# EAGLE board 008 (EAGLE 9.6.2)
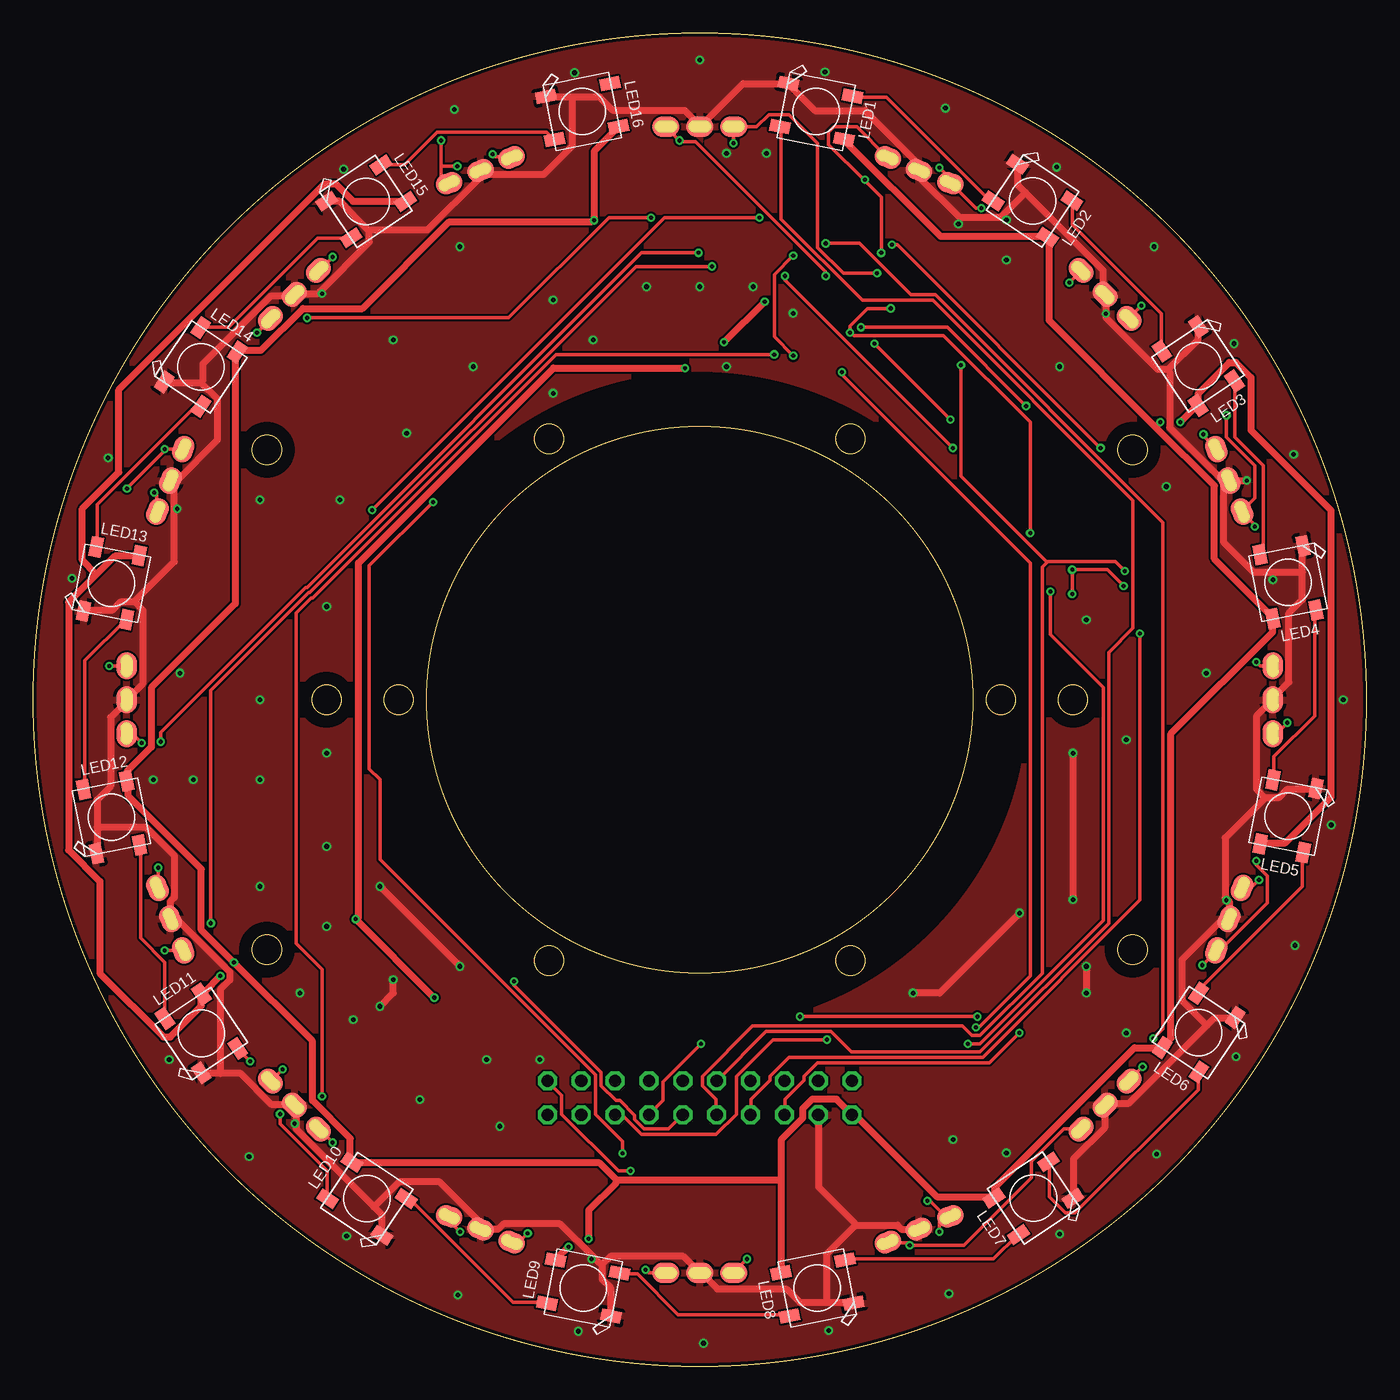
[diagram p0: board, top side]
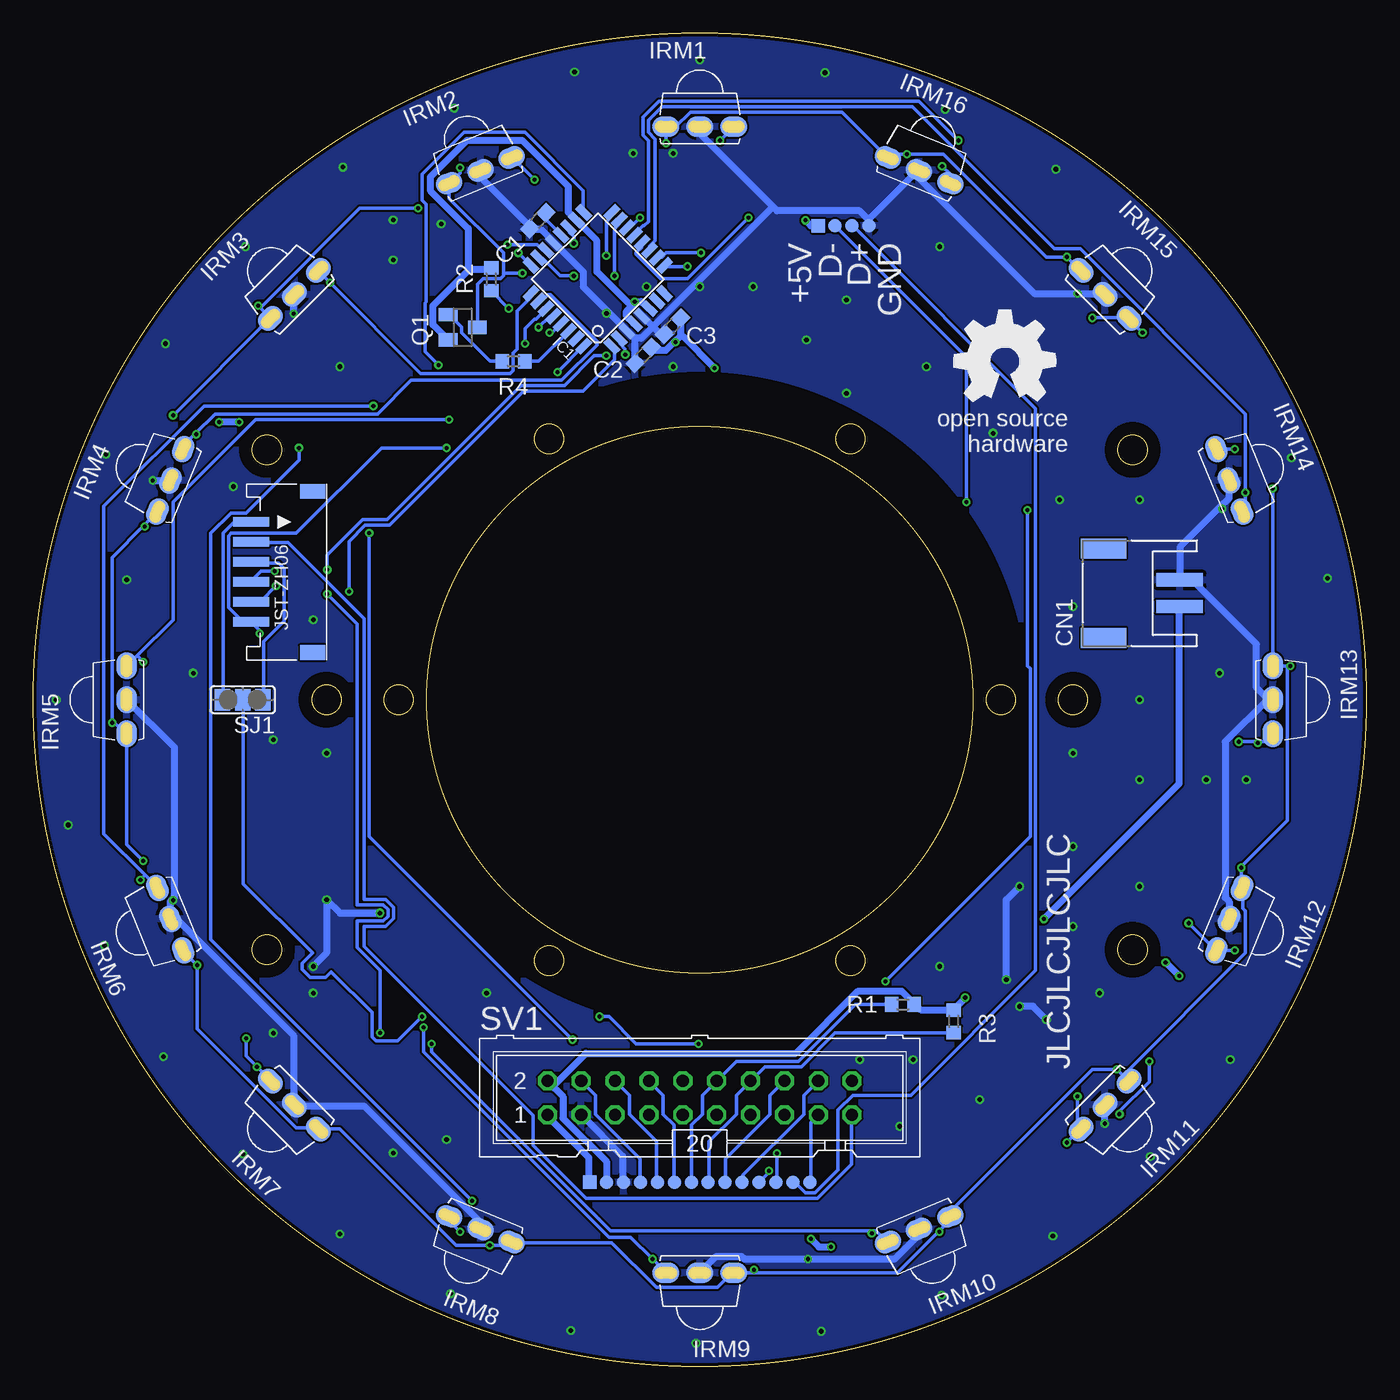
[diagram p1: board, bottom side, seen from below]

Size 100 x 100 mm. Coordinates in mm from the lower left corner, seen from the top.
Outline: circle at 78,50 radius 1.1
Outline: circle at 22,50 radius 1.1
Outline: circle at 17.52,68.75 radius 1.1
Outline: circle at 17.52,31.25 radius 1.1
Outline: circle at 82.48,68.75 radius 1.1
Outline: circle at 82.48,31.25 radius 1.1
Outline: circle at 61.3,69.57 radius 1.1
Outline: circle at 38.7,69.57 radius 1.1
Outline: circle at 72.6,50 radius 1.1
Outline: circle at 38.7,30.43 radius 1.1
Outline: circle at 27.4,50 radius 1.1
Outline: circle at 61.3,30.43 radius 1.1
Outline: circle at 50,50 radius 20.5
Outline: circle at 50,50 radius 50
Copper layers (1*16): Top 0.035mm / dielectric 1.5mm / Bottom 0.035mm
Design rules "SeeedStudio_2layer_DRU_no_angle_20140221": minimum track width 6mil, minimum drill 12mil, track to track 6mil, track to pad 6mil, pad to pad 6mil, via to via 6mil, smd to smd 0mil, copper to edge 10mil, drill to drill 10mil, minimum pad ring 10mil, minimum via ring 6mil, stop-mask expansion 2mil, vias tented up to drill 100mil, thermal gap 10mil
Net classes: 0 default: width 0.254 mm; 1 PWR: width 0.508 mm
tRestrict: area 25.5,25.5 to 74.5,74.5; area 20,48 to 24,52; area 76,48 to 80,52; area 80.5,66.8 to 84.5,70.8; area 15.5,66.7 to 19.5,70.7; area 15.5,29.2 to 19.5,33.2; area 80.5,29.3 to 84.5,33.3
bRestrict: area 25.5,25.5 to 74.5,74.5; area 20,48 to 24,52; area 76,48 to 80,52; area 80.5,66.8 to 84.5,70.8; area 15.5,66.7 to 19.5,70.7; area 15.5,29.2 to 19.5,33.2; area 80.5,29.3 to 84.5,33.3

## Footprints (pad centres in the part's own frame; a part is rotated, then mirrored left to right if it is on the bottom)
C1608 = smd 1.1 x 1: 1 -0.85,0; 2 0.85,0
S2B-PH-SM4-TB = smd 1 x 3.5: 1 1,-1; 2 -1,-1 | smd 1.5 x 3.4: S1 -3.35,4.7; S2 3.35,4.7
TQFP32-08 = smd 1.27 x 0.559: 1 -4.293,2.8; 2 -4.293,2; 3 -4.293,1.2; 4 -4.293,0.4; 5 -4.293,-0.4; 6 -4.293,-1.2; 7 -4.293,-2; 8 -4.293,-2.8; 17 4.293,-2.8; 18 4.293,-2; 19 4.293,-1.2; 20 4.293,-0.4; 21 4.293,0.4; 22 4.293,1.2; 23 4.293,2; 24 4.293,2.8 | smd 0.559 x 1.27: 9 -2.8,-4.293; 10 -2,-4.293; 11 -1.2,-4.293; 12 -0.4,-4.293; 13 0.4,-4.293; 14 1.2,-4.293; 15 2,-4.293; 16 2.8,-4.293; 25 2.8,4.293; 26 2,4.293; 27 1.2,4.293; 28 0.4,4.293; 29 -0.4,4.293; 30 -1.2,4.293; 31 -2,4.293; 32 -2.8,4.293
MYPARTS_IRM_3633N3 = smd 2 x 1.524 bottom: GND-B 0,0; OUT-B 2.54,0; VCC-B -2.54,0 | smd 2 x 1.524: GND-T 0,0; OUT-T 2.54,0; VCC-T -2.54,0
WS2812B = smd 1.5 x 0.9: 1-VDD 2.45,-1.65; 2-DOUT 2.45,1.65; 3-GND -2.45,1.65; 4-DIN -2.45,-1.65
ZH-SM4-SIDE06 = smd 0.7 x 2.7: 1 -10.35,-5.65; 2 -8.85,-5.65; 3 -7.35,-5.65; 4 -5.85,-5.65; 5 -4.35,-5.65; 6 -2.85,-5.65 | smd 1.1 x 1.9: P$1 -0.55,-1.05; P$2 -12.65,-1.05
SOT23 = smd 1 x 1.4: 1 -0.95,-1.1; 2 0.95,-1.1; 3 0,1.1
R0603 = smd 1 x 1.1: 1 -0.85,0; 2 0.85,0
SJ_2 = smd 1.168 x 1.6: 1 -1.524,0; 2 0,0; 3 1.524,0
ML20 = drill 0.914 octagon: 1 -11.43,-1.27; 2 -11.43,1.27; 3 -8.89,-1.27; 4 -8.89,1.27; 5 -6.35,-1.27; 6 -6.35,1.27; 7 -3.81,-1.27; 8 -3.81,1.27; 9 -1.27,-1.27; 10 -1.27,1.27; 11 1.27,-1.27; 12 1.27,1.27; 13 3.81,-1.27; 14 3.81,1.27; 15 6.35,-1.27; 16 6.35,1.27; 17 8.89,-1.27; 18 8.89,1.27; 19 11.43,-1.27; 20 11.43,1.27
TP10SQ = smd 1 x 1: TP 0,0
TP10R = smd 1 x 1: TP 0,0

## Placement (x,y rotation side)
C1  0.1μ  [C1608]  62.15,85.94 225 bottom
C2  0.1μ  [C1608]  54.24,75.84 225 bottom
C3  0.1μ  [C1608]  52.04,78.04 225 bottom
CN1  [S2B-PH-SM4-TB]  15,58 90 bottom
IC1  MEGA8-AI  [TQFP32-08]  57.65,81.54 135 bottom
IRM1  IRM-3638N3  [MYPARTS_IRM_3633N3]  50,93 0 bottom
IRM2  IRM-3638N3  [MYPARTS_IRM_3633N3]  66.46,89.73 22.5 bottom
IRM3  IRM-3638N3  [MYPARTS_IRM_3633N3]  80.41,80.41 45 bottom
IRM4  IRM-3638N3  [MYPARTS_IRM_3633N3]  89.73,66.46 67.5 bottom
IRM5  IRM-3638N3  [MYPARTS_IRM_3633N3]  93,50 90 bottom
IRM6  IRM-3638N3  [MYPARTS_IRM_3633N3]  89.73,33.54 112.5 bottom
IRM7  IRM-3638N3  [MYPARTS_IRM_3633N3]  80.41,19.59 135 bottom
IRM8  IRM-3638N3  [MYPARTS_IRM_3633N3]  66.46,10.27 157.5 bottom
IRM9  IRM-3638N3  [MYPARTS_IRM_3633N3]  50,7 180 bottom
IRM10  IRM-3638N3  [MYPARTS_IRM_3633N3]  33.54,10.27 202.5 bottom
IRM11  IRM-3638N3  [MYPARTS_IRM_3633N3]  19.59,19.59 225 bottom
IRM12  IRM-3638N3  [MYPARTS_IRM_3633N3]  10.27,33.54 247.5 bottom
IRM13  IRM-3638N3  [MYPARTS_IRM_3633N3]  7,50 270 bottom
IRM14  IRM-3638N3  [MYPARTS_IRM_3633N3]  10.27,66.46 292.5 bottom
IRM15  IRM-3638N3  [MYPARTS_IRM_3633N3]  19.59,80.41 315 bottom
IRM16  IRM-3638N3  [MYPARTS_IRM_3633N3]  33.54,89.73 337.5 bottom
LED1  WS2812B5050  [WS2812B]  58.74,94.14 348.8 top
LED2  WS2812B5050  [WS2812B]  74.97,87.44 326.3 top
LED3  WS2812B5050  [WS2812B]  87.39,75.03 303.8 top
LED4  WS2812B5050  [WS2812B]  94.13,58.82 281.3 top
LED5  WS2812B5050  [WS2812B]  94.14,41.26 258.8 top
LED6  WS2812B5050  [WS2812B]  87.44,25.03 236.3 top
LED7  WS2812B5050  [WS2812B]  75.03,12.61 213.8 top
LED8  WS2812B5050  [WS2812B]  58.82,5.87 191.3 top
LED9  WS2812B5050  [WS2812B]  41.26,5.86 168.8 top
LED10  WS2812B5050  [WS2812B]  25.03,12.56 146.3 top
LED11  WS2812B5050  [WS2812B]  12.61,24.97 123.8 top
LED12  WS2812B5050  [WS2812B]  5.87,41.18 101.3 top
LED13  WS2812B5050  [WS2812B]  5.86,58.74 78.8 top
LED14  WS2812B5050  [WS2812B]  12.56,74.97 56.3 top
LED15  WS2812B5050  [WS2812B]  24.97,87.39 33.8 top
LED16  WS2812B5050  [WS2812B]  41.18,94.13 11.3 top
P1  S6B-ZR-SM4A-TF  [ZH-SM4-SIDE06]  78,53 270 bottom
Q1  BSS84  [SOT23]  67.78,77.94 270 bottom
R1  33k  [R0603]  34.76,27.14 180 bottom
R2  33k  [R0603]  65.65,81.54 270 bottom
R3  33k  [R0603]  30.95,25.87 270 bottom
R4  47  [R0603]  63.97,75.4 180 bottom
SJ1  [SJ_2]  84.29,50 180 bottom
SV1  [ML20]  50,20.14 0 bottom
TP1  TPSQTP10SQ  [TP10SQ]  58.26,13.8 90 bottom
TP2  TPSQTP10R  [TP10R]  56.98,13.8 90 bottom
TP3  TPSQTP10R  [TP10R]  55.72,13.8 90 bottom
TP4  TPSQTP10R  [TP10R]  54.45,13.8 90 bottom
TP5  TPSQTP10R  [TP10R]  53.17,13.8 90 bottom
TP6  TPSQTP10R  [TP10R]  51.91,13.8 90 bottom
TP7  TPSQTP10R  [TP10R]  45.55,13.8 90 bottom
TP8  TPSQTP10R  [TP10R]  48.09,13.8 90 bottom
TP9  TPSQTP10R  [TP10R]  46.83,13.8 90 bottom
TP10  TPSQTP10R  [TP10R]  50.63,13.8 90 bottom
TP11  TPSQTP10R  [TP10R]  49.37,13.8 90 bottom
TP12  TPSQTP10SQ  [TP10SQ]  41.11,85.56 180 bottom
TP13  TPSQTP10R  [TP10R]  39.84,85.56 180 bottom
TP14  TPSQTP10R  [TP10R]  38.57,85.56 180 bottom
TP15  TPSQTP10R  [TP10R]  37.3,85.56 180 bottom
TP16  TPSQTP10R  [TP10R]  43.02,13.8 270 bottom
TP17  TPSQTP10R  [TP10R]  44.28,13.8 270 bottom
TP18  TPSQTP10R  [TP10R]  41.74,13.8 0 bottom
U$1  [OSHW_8MM]  27.14,75.4 0 bottom

## Library data of the parts
C1-C3 = rcl; SPICEPREFIX: C
CN1 = jst-ph
IC1 = atmel; MPN: ATMEGA8-16AU; OC_FARNELL: 9171371; OC_NEWARK: 73M8863
IRM1-IRM16 = #002-CPU
LED1-LED16 = microbuilder
P1 = zh
Q1 = transistor-small-signal
R1-R4 = rcl; SPICEPREFIX: R
SJ1 = jumper
SV1 = con-ml; OC_FARNELL: unknown; OC_NEWARK: unknown
TP1-TP18 = testpad
U$1 = oshw

## Nets
!BALL_RST: IC1.30 R4.1
!RESET: IC1.29 R2.2 SV1.15
+3V3 [PWR]: C2.1 C3.1 CN1.2 IC1.4 IC1.6 IC1.18 Q1.2 R1.1 R2.1 R3.1 SV1.2 TP2.TP
+5V [PWR]: LED1.1-VDD LED2.1-VDD LED3.1-VDD LED4.1-VDD LED5.1-VDD LED6.1-VDD LED7.1-VDD LED8.1-VDD LED9.1-VDD LED10.1-VDD LED11.1-VDD LED12.1-VDD LED13.1-VDD LED14.1-VDD LED15.1-VDD LED16.1-VDD SV1.1 TP1.TP TP12.TP
BALL01: IC1.23 IRM1.OUT-B IRM1.OUT-T
BALL02: IC1.24 IRM2.OUT-B IRM2.OUT-T
BALL03: IC1.25 IRM3.OUT-B IRM3.OUT-T
BALL04: IC1.26 IRM4.OUT-B IRM4.OUT-T
BALL05: IC1.27 IRM5.OUT-B IRM5.OUT-T
BALL06: IC1.28 IRM6.OUT-B IRM6.OUT-T
BALL07: IC1.19 IRM7.OUT-B IRM7.OUT-T
BALL08: IC1.22 IRM8.OUT-B IRM8.OUT-T
BALL09: IC1.32 IRM9.OUT-B IRM9.OUT-T
BALL10: IC1.1 IRM10.OUT-B IRM10.OUT-T
BALL11: IC1.2 IRM11.OUT-B IRM11.OUT-T
BALL12: IC1.9 IRM12.OUT-B IRM12.OUT-T
BALL13: IC1.10 IRM13.OUT-B IRM13.OUT-T
BALL14: IC1.11 IRM14.OUT-B IRM14.OUT-T
BALL15: IC1.12 IRM15.OUT-B IRM15.OUT-T
BALL16: IC1.13 IRM16.OUT-B IRM16.OUT-T
BALL_VIN: IRM1.VCC-B IRM1.VCC-T IRM2.VCC-B IRM2.VCC-T IRM3.VCC-B IRM3.VCC-T IRM4.VCC-B IRM4.VCC-T IRM5.VCC-B IRM5.VCC-T IRM6.VCC-B IRM6.VCC-T IRM7.VCC-B IRM7.VCC-T IRM8.VCC-B IRM8.VCC-T IRM9.VCC-B IRM9.VCC-T IRM10.VCC-B IRM10.VCC-T IRM11.VCC-B IRM11.VCC-T IRM12.VCC-B IRM12.VCC-T IRM13.VCC-B IRM13.VCC-T IRM14.VCC-B IRM14.VCC-T IRM15.VCC-B IRM15.VCC-T IRM16.VCC-B IRM16.VCC-T Q1.3
CAM-UTIL: SJ1.2 SV1.13
D+: TP14.TP TP16.TP
D-: TP13.TP TP17.TP
GND [PWR]: C1.2 C2.2 C3.2 CN1.1 IC1.3 IC1.5 IC1.21 IRM1.GND-B IRM1.GND-T IRM2.GND-B IRM2.GND-T IRM3.GND-B IRM3.GND-T IRM4.GND-B IRM4.GND-T IRM5.GND-B IRM5.GND-T IRM6.GND-B IRM6.GND-T IRM7.GND-B IRM7.GND-T IRM8.GND-B IRM8.GND-T IRM9.GND-B IRM9.GND-T IRM10.GND-B IRM10.GND-T IRM11.GND-B IRM11.GND-T IRM12.GND-B IRM12.GND-T IRM13.GND-B IRM13.GND-T IRM14.GND-B IRM14.GND-T IRM15.GND-B IRM15.GND-T IRM16.GND-B IRM16.GND-T LED1.3-GND LED2.3-GND LED3.3-GND LED4.3-GND LED5.3-GND LED6.3-GND LED7.3-GND LED8.3-GND LED9.3-GND LED10.3-GND LED11.3-GND LED12.3-GND LED13.3-GND LED14.3-GND LED15.3-GND LED16.3-GND SV1.3 TP3.TP TP15.TP
MISO: IC1.16 P1.5 SV1.5
MOSI: IC1.15 P1.6 SV1.7
N$1: LED12.2-DOUT LED13.4-DIN
N$2: LED6.2-DOUT LED7.4-DIN
N$3: C1.1 IC1.20
N$4: Q1.1 R4.2
NEOPIXEL: LED1.4-DIN SV1.10
NEOPIXEL1: LED1.2-DOUT LED2.4-DIN
NEOPIXEL2: LED2.2-DOUT LED3.4-DIN
NEOPIXEL3: LED3.2-DOUT LED4.4-DIN
NEOPIXEL4: LED4.2-DOUT LED5.4-DIN
NEOPIXEL5: LED5.2-DOUT LED6.4-DIN
NEOPIXEL6: LED7.2-DOUT LED8.4-DIN
NEOPIXEL7: LED8.2-DOUT LED9.4-DIN
NEOPIXEL8: LED9.2-DOUT LED10.4-DIN
NEOPIXEL9: LED10.2-DOUT LED11.4-DIN
NEOPIXEL10: LED11.2-DOUT LED12.4-DIN
NEOPIXEL11: LED13.2-DOUT LED14.4-DIN
NEOPIXEL12: LED14.2-DOUT LED15.4-DIN
NEOPIXEL13: LED15.2-DOUT LED16.4-DIN
NRST: SV1.8 TP6.TP
RX-CAM: P1.1 SJ1.3
RX-PC: SV1.16 TP8.TP
SCK: IC1.17 P1.4 SV1.9
SCL: R3.2 SV1.14 TP11.TP
SDA: R1.2 SV1.12 TP10.TP
SS1: IC1.14 SV1.11
SS-CAM: P1.3 SJ1.1
SWCLK: SV1.4 TP4.TP
SWDIO: SV1.6 TP5.TP
SWO: SV1.17 TP18.TP
TX-CAM: P1.2 SV1.19
TX-PC: SV1.18 TP9.TP
UI: SV1.20 TP7.TP

## Tracks (layer width: path | path; a pad name or v marks a point on that pad's centre or on a via)
!BALL_RST
  Bottom 0.254: R4.1 62.09,75.4 59.86,77.64 IC1.30
!RESET  (via drill 0.3)
  Top 0.254: v64.33,79.36 62.6,79.36 61.28,78.04 v61.28,77.53 61.38,77.53 61.58,77.33 68.29,77.33 74.79,70.83 v74.79,62.5 | v59.55,24.5 55.49,24.5 52.74,21.75 52.74,18.91 51.22,17.39 45.63,17.39 44.21,18.81 43.7,18.81 SV1.15
  Bottom 0.254: v64.33,79.36 R2.2 | v61.28,77.53 61.07,77.53 60.47,78.14 IC1.29 | v59.55,24.5 74.79,39.74 v74.79,62.5
+3V3  (via drill 0.3)
  Top 0.508: v54.88,79.87 v51.83,76.82 | v30.09,27.65 v24.19,33.54 24.4,33.64 24.4,60.26 39.03,74.89 v48.88,74.89
  Bottom 0.508: 67.27,82.31 65.75,82.31 R2.1 | 67.27,82.31 70.02,79.57 70.02,78.14 68.9,77.03 Q1.2 | 51.42,77.33 51.42,78.55 C3.1 | 51.88,76.87 52.54,76.21 53.35,76.21 53.56,76.42 C2.1 | 51.88,76.87 51.42,77.33 | 54.77,79.87 54.37,79.87 53.86,79.36 IC1.6 | 55.13,79.52 55.49,79.16 55.49,78.75 54.98,78.25 IC1.4 | 55.13,79.52 54.77,79.87 | 55.13,79.52 57.72,82.11 57.72,84.44 59.25,85.97 IC1.18 59.45,86.17 59.86,86.58 59.86,88.51 63.31,91.96 67.47,91.96 70.22,89.22 70.22,88.2 67.37,85.36 67.37,82.51 67.27,82.31 | v51.83,76.82 51.88,76.87 | v54.88,79.87 54.77,79.87 | TP2.TP 57.01,13.83 57.01,15.35 60.26,18.61 60.26,20.23 61.38,21.35 SV1.2 60.87,21.15 58.53,23.48 42.79,23.48 38.11,28.16 34.86,28.16 34.05,27.34 R1.1 33.85,27.14 33.44,26.73 31,26.73 R3.1 30.8,26.94 v30.09,27.65 | v24.19,33.54 14.03,43.7 14.03,56.91 CN1.2 | v48.88,74.89 51.22,77.23 51.42,77.33
+5V  (via drill 0.3)
  Top 0.508: 4.74,59.4 6.11,60.77 7.94,60.77 LED13.1-VDD | 4.74,59.4 2.65,57.31 2.65,38.72 4.99,36.39 4.99,29.48 9.77,24.7 10.27,24.7 12.61,27.04 12.61,27.85 LED11.1-VDD 12.81,28.05 v14.03,29.27 | 4.74,59.4 3.67,60.47 3.67,64.33 6.41,67.07 6.41,73.27 21.86,88.71 22.67,88.71 23.99,87.39 27.85,87.39 LED15.1-VDD | LED16.1-VDD 43.9,92.98 42.08,91.15 v42.08,85.97 41.87,85.87 31.2,85.87 24.7,79.36 20.23,79.36 17.08,76.21 15.46,76.21 LED14.1-VDD 15.25,76.01 15.15,75.91 15.15,57.21 8.85,50.91 8.85,46.44 7.02,44.62 7.02,44.01 LED12.1-VDD 7.12,43.7 7.12,42.79 12.61,37.3 12.61,32.73 v15.05,30.29 20.94,24.4 20.94,19.93 23.79,17.08 23.79,15.46 LED10.1-VDD 23.99,15.25 42.48,15.25 43.8,13.93 | LED5.1-VDD 92.06,39.23 93.89,39.23 97.35,42.69 97.35,64.22 91.35,70.22 91.35,74.18 90.23,75.3 89.73,75.3 87.39,72.96 87.39,72.15 LED3.1-VDD 87.19,71.95 v86.07,70.83 | LED1.1-VDD 60.87,91.96 68.09,84.75 76.01,84.75 LED2.1-VDD 76.21,84.54 76.21,78.45 84.19,70.47 | 56.1,13.93 56.1,16.98 57.72,18.61 57.72,19.32 58.43,20.03 60.26,20.03 61.38,18.91 SV1.1 61.68,18.81 67.78,12.71 72.05,12.71 LED7.1-VDD 72.15,12.92 72.15,13.42 82.61,23.89 84.65,23.89 LED6.1-VDD 84.85,24.09 85.36,24.6 85.36,47.46 92.98,55.08 92.98,55.99 LED4.1-VDD 92.88,56.3 88.61,60.57 88.61,66.05 84.19,70.47 | 56.1,13.93 56.1,7.02 LED8.1-VDD | 56.1,13.93 43.8,13.93 | v40.14,8.95 39.23,8.04 LED9.1-VDD | v41.67,9.56 41.67,11.7 43.7,13.73 43.8,13.93 | 84.19,70.47 v84.54,70.83
  Bottom 0.508: TP12.TP 41.67,85.56 v42.08,85.97 | TP1.TP 58.33,13.83 58.33,15.66 61.48,18.81 SV1.1 | v40.14,8.95 41.06,8.95 v41.67,9.56 | v84.54,70.83 v86.07,70.83 | v15.05,30.29 v14.03,29.27
BALL01  (via drill 0.3)
  Top 0.254: v59.45,81.8 59.45,82.11 49.7,91.86 48.58,91.86 v48.48,91.96 47.46,92.98 IRM1.OUT-T
  Bottom 0.254: v59.45,81.8 60.47,81.8 61.79,83.12 62.09,83.12 IC1.23 | v48.48,91.96 47.46,92.98 IRM1.OUT-T
BALL02  (via drill 0.3)
  Top 0.254: v63.61,83.53 63.61,87.69 62.34,88.96 | 62.34,88.96 59.65,91.66 59.65,92.57 60.06,92.98 61.79,92.98 64.02,90.74 IRM2.OUT-T | v62.39,89.01 62.34,88.96
  Bottom 0.254: v63.61,83.53 62.7,82.61 IC1.24 | v62.39,89.01 64.02,90.64 IRM2.OUT-T
BALL03  (via drill 0.3)
  Top 0.254: v77.74,81.29 78.55,82.11 IRM3.OUT-T
  Bottom 0.254: IC1.25 62.7,80.48 62.7,80.17 63.72,79.16 63.72,76.31 64.02,76.01 64.02,74.69 64.22,74.49 70.93,74.49 v77.74,81.29 78.55,82.11 IRM3.OUT-T
BALL04  (via drill 0.3)
  Top 0.254: v87.8,69.91 87.8,69.81 88.71,68.9 IRM4.OUT-T
  Bottom 0.254: 87.85,69.96 88.71,69.1 88.71,68.9 IRM4.OUT-T | 87.85,69.96 86.37,71.44 74.18,71.44 71.64,73.98 60.36,73.98 57.72,76.62 57.72,76.92 61.18,80.38 61.38,80.38 61.79,79.97 62.09,79.97 IC1.26 | v87.8,69.91 87.85,69.96
BALL05  (via drill 0.3)
  Top 0.254: v68.8,71.03 v63.11,76.72 | IRM5.OUT-T 92.06,52.54 v91.76,52.84
  Bottom 0.254: v63.11,76.72 63.11,77.84 62.39,78.55 62.29,78.55 61.58,79.26 IC1.27 | v68.8,71.03 83.33,71.03 89.52,64.83 89.52,55.99 92.22,53.3 | 92.22,53.3 92.98,52.54 IRM5.OUT-T | 92.22,53.3 v91.76,52.84
BALL06  (via drill 0.3)
  Top 0.254: v62.09,77.94 68.59,77.94 v74.49,72.05 | v91.96,36.49 91.45,35.98 90.74,35.98 IRM6.OUT-T
  Bottom 0.254: v62.09,77.94 61.28,78.75 60.97,78.75 IC1.28 | v74.49,72.05 87.19,72.05 94.7,64.53 94.7,39.94 91.6,36.84 | 91.6,36.84 90.74,35.98 IRM6.OUT-T | 91.6,36.84 v91.96,36.49
BALL07  (via drill 0.3)
  Top 0.254: v59.45,84.24 61.99,84.24 65.85,80.38 67.68,80.38 84.75,63.31 84.75,25.31 v84.04,24.6 | v83.22,22.47 82.21,21.45 IRM7.OUT-T
  Bottom 0.254: v59.45,84.24 59.45,84.75 59.75,85.05 59.75,85.36 IC1.19 | v84.04,24.6 84.04,23.28 v83.22,22.47 82.21,21.45 IRM7.OUT-T
BALL08  (via drill 0.3)
  Top 0.254: v64.43,84.14 64.83,84.14 v80.07,68.9 | v67.07,12.41 67.27,12.41 68.39,11.29 68.8,11.29 IRM8.OUT-T 68.39,11.19 67.98,10.78 v67.98,10.07
  Bottom 0.254: v64.43,84.14 62.19,84.14 61.79,83.73 61.58,83.73 IC1.22 | v80.07,68.9 80.07,67.98 84.04,64.02 85.15,64.02 86.68,62.5 86.68,32.02 v67.07,12.41 | v67.98,10.07 68.8,10.88 68.8,11.19 IRM8.OUT-T
BALL09  (via drill 0.3)
  Top 0.254: v60.67,74.59 60.67,74.38 74.79,60.26 74.79,29.27 70.93,25.41 v70.73,25.41 | v53.56,8.04 52.54,7.02 IRM9.OUT-T
  Bottom 0.254: v60.67,74.59 58.74,76.52 IC1.32 | v70.73,25.41 70.73,23.58 56.81,9.66 55.18,9.66 v53.56,8.04 52.54,7.02 IRM9.OUT-T
BALL10  (via drill 0.3)
  Top 0.254: v76.31,58.13 76.31,54.88 80.28,50.91 80.28,33.44 71.03,24.19 v70.12,24.19 | v37.1,9.97 36.49,9.36 35.98,9.36 IRM10.OUT-T
  Bottom 0.254: v76.31,58.13 76.31,61.89 75.09,63.11 73.27,63.11 63.21,73.16 58.74,73.16 56.4,75.5 56.4,76.11 56.5,76.21 56.5,76.52 IC1.1 | v70.12,24.19 70.12,23.58 56.71,10.17 37.1,10.17 | 37.1,10.17 36.79,10.17 35.98,9.36 IRM10.OUT-T | v37.1,9.97 37.1,10.17
BALL11  (via drill 0.3)
  Top 0.254: v55.59,75.91 39.23,75.91 20.94,57.62 20.84,57.62 19.72,56.5 19.72,31.71 21.65,29.78 v21.65,20.23 | v22.47,16.78 21.45,17.79 IRM11.OUT-T
  Bottom 0.254: v55.59,75.91 55.59,76.31 55.99,76.72 55.99,77.03 IC1.2 | v21.65,20.23 21.65,18.1 21.45,17.89 IRM11.OUT-T 21.45,17.79 v22.47,16.78
BALL12  (via drill 0.3)
  Top 0.254: v50.91,82.51 45.23,82.51 20.74,58.03 20.64,58.03 13.32,50.71 v13.32,33.24 | v9.87,31.2 11.19,31.2 IRM12.OUT-T
  Bottom 0.254: v50.91,82.51 52.54,82.51 IC1.9 | v13.32,33.24 11.29,31.2 IRM12.OUT-T 11.19,31.2 v9.87,31.2
BALL13  (via drill 0.3)
  Top 0.254: v49.9,83.53 45.63,83.53 20.54,58.43 20.43,58.43 9.56,47.56 v9.56,46.85 | IRM13.OUT-T 7.43,47.46 v8.14,46.75
  Bottom 0.254: v49.9,83.53 52.54,83.53 52.84,83.22 53.15,83.22 IC1.10 | 8.14,46.85 7.63,46.85 7.02,47.46 IRM13.OUT-T | 8.14,46.85 v9.56,46.85 | v8.14,46.75 8.14,46.85
BALL14  (via drill 0.3)
  Top 0.254: v9.05,65.55 9.26,65.34 9.26,64.12 IRM14.OUT-T
  Bottom 0.254: IC1.11 53.76,83.73 53.76,84.04 53.35,84.44 53.35,92.06 53.86,92.57 53.86,93.48 52.84,94.5 34.05,94.5 23.38,83.83 21.45,83.83 9.05,71.44 v9.05,65.55 9.05,64.33 9.26,64.12 IRM14.OUT-T
BALL15  (via drill 0.3)
  Top 0.254: v46.34,86.17 43.19,86.17 35.67,78.65 v20.54,78.65 | v16.78,77.53 17.79,78.55 IRM15.OUT-T
  Bottom 0.254: v46.34,86.17 50.91,81.6 52.95,81.6 54.77,83.43 54.77,83.53 54.37,83.93 54.37,84.24 IC1.12 | v20.54,78.65 17.89,78.65 IRM15.OUT-T 17.79,78.55 v16.78,77.53
BALL16  (via drill 0.3)
  Top 0.254: 30.59,90.03 30.59,89.32 31.1,88.81 IRM16.OUT-T | 30.59,90.03 v30.59,91.96 | 30.59,90.03 v31.81,90.03
  Bottom 0.254: v30.59,91.96 33.54,94.91 53.05,94.91 54.27,93.69 54.27,92.37 53.86,91.96 53.86,85.87 54.17,85.56 54.27,85.56 54.88,84.95 IC1.13 | v31.81,90.03 31.2,89.42 31.2,88.81 IRM16.OUT-T
BALL_VIN  (via drill 0.3)
  Top 0.254: v52.54,91.76 IRM1.VCC-T 52.64,92.98 54.27,92.98 55.18,93.89 56.71,93.89 58.84,91.76 58.84,83.93 60.77,82 v63.31,82 | v22.47,83.22 21.45,82.21 IRM15.VCC-T | v34.45,90.94 34.66,90.74 35.88,90.74 IRM16.VCC-T | IRM14.VCC-T 11.19,68.8 v9.87,68.8 9.87,68.69 v7.02,65.85 | v5.7,52.54 IRM13.VCC-T | v9.36,37.4 9.36,35.98 IRM12.VCC-T | v83.12,79.57 82.21,78.65 IRM3.VCC-T | v67.98,89.93 68.8,89.12 68.8,88.81 IRM2.VCC-T 68.9,88.71 70.73,86.88 v71.13,86.88 | 65.8,9.11 65.85,9.05 69.81,9.05 74.89,14.13 74.89,15.35 77.33,17.79 78.55,17.79 IRM7.VCC-T | 65.8,9.11 65.65,9.26 64.12,9.26 IRM8.VCC-T | IRM5.VCC-T 93.28,47.46 v94.09,48.27 | v91.66,63.01 91.66,63.11 90.74,64.02 IRM4.VCC-T 90.74,64.22 91.66,65.14 91.66,67.58 89.52,69.71 v89.52,71.34 | v87.69,30.09 88.71,31.1 IRM6.VCC-T 88.81,31.31 89.12,31.31 92.57,34.76 92.57,36.79 91.76,37.61 v91.76,37.91 | v18.71,22.26 17.89,21.45 IRM11.VCC-T | v45.94,7.23 46.14,7.02 47.46,7.02 IRM9.VCC-T | v32.02,10.07 31.2,10.88 31.2,11.19 IRM10.VCC-T | v65.75,9.05 65.8,9.11
  Bottom 0.254: v52.54,91.76 IRM1.VCC-T 52.44,92.98 51.83,92.98 50.71,94.09 39.33,94.09 35.98,90.74 IRM16.VCC-T 35.88,90.74 35.67,90.94 v34.45,90.94 31.71,90.94 23.99,83.22 v22.47,83.22 21.45,82.21 IRM15.VCC-T | v9.87,68.8 11.19,68.8 IRM14.VCC-T | v7.02,65.85 7.02,52.64 IRM13.VCC-T v5.7,52.54 5.91,52.44 5.91,40.96 9.36,37.5 v9.36,37.4 9.36,35.98 IRM12.VCC-T 9.26,35.78 9.26,34.35 9.05,34.15 9.05,31 18.2,21.86 IRM11.VCC-T 17.89,21.45 v18.71,22.26 20.54,22.26 31.1,11.7 31.1,11.29 IRM10.VCC-T 31.2,11.19 31.2,10.99 32.07,10.12 | 64.73,82 64.73,83.53 68.8,87.59 68.8,88.71 IRM2.VCC-T 68.69,88.81 67.98,89.52 v67.98,89.93 | 64.73,82 64.73,81.8 64.94,81.6 66.26,81.6 66.66,81.19 66.66,77.94 Q1.3 | v71.13,86.88 75.5,86.88 82.92,79.46 v83.12,79.57 82.21,78.65 IRM3.VCC-T 82.31,78.55 v89.52,71.34 | 91.71,63.06 90.74,64.02 IRM4.VCC-T | 91.71,63.06 94.09,60.67 v94.09,48.27 93.89,48.27 93.08,47.46 IRM5.VCC-T 92.98,47.36 92.98,39.13 v91.76,37.91 | v91.66,63.01 91.71,63.06 | IRM6.VCC-T 88.71,31.1 v87.69,30.09 87.69,25.31 80.28,17.89 78.65,17.89 IRM7.VCC-T 78.55,17.79 77.03,17.79 68.29,9.05 v65.75,9.05 64.43,9.05 64.22,9.26 IRM8.VCC-T 64.02,9.26 56.6,9.26 53.25,5.91 48.68,5.91 47.56,7.02 IRM9.VCC-T 47.46,7.02 45.94,7.02 | 45.94,7.02 35.17,7.02 32.07,10.12 | v45.94,7.23 45.94,7.02 | v32.02,10.07 32.07,10.12 | 64.73,82 v63.31,82
CAM-UTIL  (via drill 0.3)
  Top 0.254: v57.52,26.23 v70.83,26.23 | v50.1,24.19 47.26,21.35 47.26,19.93 46.24,18.91 SV1.13
  Bottom 0.254: v70.83,26.23 72.66,24.4 74.28,24.4 74.59,24.7 74.59,26.53 77.65,29.59 78.08,29.17 79.22,29.17 79.83,29.78 79.83,30.22 79.06,31 84.24,36.18 84.24,50 SJ1.2 | v57.52,26.23 56.81,26.23 54.77,24.19 v50.1,24.19
D+
  Bottom 0.254: TP16.TP 42.99,13.73 42.79,13.73 42.08,13.02 41.36,13.02 39.64,14.74 39.64,19.21 38.52,20.33 34.15,20.33 24.8,29.68 24.8,71.84 38.52,85.56 TP14.TP
D-  (via drill 0.3)
  Top 0.254: v44.21,15.96 44.21,16.88 42.18,18.91 42.18,21.86 26.02,38.01 26.02,44.01 25.21,44.82 25.21,60.06 v29.98,64.83
  Bottom 0.254: v44.21,15.96 44.21,13.83 TP17.TP | v29.98,64.83 29.98,75.7 TP13.TP
GND  (via drill 0.3, 0.35)
  Top 0.508: v91.05,66.46 89.83,66.46 IRM4.GND-B | 85.15,74.79 87.39,77.03 87.39,77.94 LED3.3-GND | 85.15,74.79 84.34,74.79 80.48,78.65 v80.48,78.96 80.48,80.38 IRM3.GND-B 80.28,80.58 80.28,82.21 74.44,88.05 | 74.44,88.05 73.88,88.61 73.88,90.13 LED2.3-GND | 74.44,88.05 72.56,86.17 69.51,86.17 66.46,89.22 IRM2.GND-B 66.36,89.93 66.36,90.23 62.39,94.2 58.64,94.2 56.81,96.03 LED1.3-GND 56.6,96.23 53.25,96.23 50.2,93.18 IRM1.GND-B 50,93.08 48.88,94.2 43.5,94.2 42.48,95.21 40.45,95.21 | IRM4.GND-B 89.52,66.56 89.12,66.56 85.25,70.42 85.25,74.59 85.15,74.79 | LED7.3-GND 78.04,12.61 78.04,15.56 80.38,17.89 80.38,19.52 IRM7.GND-B 80.58,19.72 82.21,19.72 88.05,25.57 | 88.05,25.57 88.61,26.12 90.13,26.12 LED6.3-GND | 92.37,42.69 93.48,42.69 94.09,43.29 96.23,43.29 LED5.3-GND | 92.37,42.69 91.76,43.29 91.76,48.78 92.98,50 IRM5.GND-B 93.08,50.2 94.2,51.32 94.2,56.5 95.21,57.52 95.21,59.55 | 95.21,59.55 95.21,61.48 LED4.3-GND | 89.73,34.86 89.73,33.64 IRM6.GND-B 89.52,33.44 89.12,33.44 86.17,30.49 86.17,27.45 88.05,25.57 | 89.73,34.86 89.42,35.17 89.42,39.64 92.27,42.48 92.37,42.69 | v89.52,34.96 89.73,34.86 | 95.21,59.55 91.55,59.55 89.32,61.79 89.32,66.36 IRM4.GND-B | 14.03,21.96 15.56,21.96 17.89,19.62 19.52,19.62 IRM11.GND-B 19.72,19.42 19.72,18.2 | 14.03,21.96 12.61,21.96 LED11.3-GND | 25.57,11.95 19.72,17.79 19.72,18.2 | 25.57,11.95 26.12,11.39 26.12,9.87 LED10.3-GND | v19.62,18.2 19.72,18.2 | 42.69,7.63 42.69,6.52 43.29,5.91 43.29,3.77 LED9.3-GND | 42.69,7.63 43.29,8.24 48.78,8.24 50,7.02 IRM9.GND-B 50.2,6.92 51.32,5.8 56.5,5.8 57.52,4.79 59.55,4.79 | 59.55,4.79 61.48,4.79 LED8.3-GND
  Top 0.508: 42.02,8.19 42.48,7.73 42.69,7.63 | 42.02,8.19 39.53,10.68 35.27,10.68 34.86,10.27 33.64,10.27 IRM10.GND-B 33.44,10.48 33.44,10.88 30.49,13.83 27.45,13.83 25.57,11.95 | 61.68,10.58 64.83,10.58 65.14,10.27 66.36,10.27 IRM8.GND-B | 61.68,10.58 59.55,8.45 59.55,4.79 | SV1.3 58.94,18.81 58.94,13.42 61.58,10.78 61.68,10.58 | v41.87,8.04 42.02,8.19 | 12.61,73.77 9.87,73.77 LED14.3-GND | 12.61,73.77 13.83,72.56 13.83,69.51 10.78,66.46 IRM14.GND-B 10.58,66.26 10.58,64.33 | 7.63,57.31 6.52,57.31 5.91,56.71 3.77,56.71 LED13.3-GND | 7.63,57.31 8.24,56.71 8.24,51.22 7.02,50 IRM13.GND-B 6.92,49.8 5.8,48.68 5.8,43.5 4.79,42.48 4.79,40.45 | 4.79,40.45 4.79,38.52 LED12.3-GND | 4.79,40.45 8.45,40.45 10.58,38.32 10.58,35.17 10.27,34.86 10.27,33.64 IRM12.GND-B 10.48,33.44 10.88,33.44 14.74,29.58 14.74,28.97 14.03,28.26 14.03,21.96 | 10.58,64.33 10.58,60.36 7.73,57.52 7.63,57.31 | v10.78,64.33 10.58,64.33 | 40.45,95.21 38.52,95.21 LED16.3-GND | 25.21,85.15 22.97,87.39 22.06,87.39 LED15.3-GND | 25.21,85.15 25.21,84.34 21.5,80.63 | 21.5,80.63 21.35,80.48 19.62,80.48 IRM15.GND-B 19.42,80.28 17.79,80.28 12.71,75.2 12.71,73.98 12.61,73.77 | 25.21,85.15 25.41,85.25 29.58,85.25 33.54,89.22 IRM16.GND-B 33.74,89.42 38.32,89.42 40.45,91.55 40.45,95.21 | v21.65,80.48 21.5,80.63 | v78,46 v78,35 | v79,30 v79,28 | v74,34 68,28 v66,28 | v26,27 27,28 v27,29 | v26,36 v32,30
  Bottom 0.508: v91.05,66.46 89.83,66.46 IRM4.GND-B | v80.48,78.96 80.48,80.38 IRM3.GND-B | IRM8.GND-B 66.46,10.78 75.2,19.52 80.38,19.52 IRM7.GND-B 80.48,19.82 80.48,24.8 89.12,33.44 89.52,33.44 IRM6.GND-B 89.73,33.64 89.73,34.86 | 89.73,34.86 89.42,35.17 89.42,46.44 92.98,50 IRM5.GND-B | v89.52,34.96 89.73,34.86 | v19.62,18.2 19.62,19.52 IRM11.GND-B | IRM10.GND-B 33.64,10.17 33.64,9.77 35.37,8.04 v41.87,8.04 46.65,8.04 46.85,8.24 48.78,8.24 50,7.02 IRM9.GND-B 50,7.5 | TP3.TP 55.79,13.83 55.79,15.76 58.84,18.81 SV1.3 | 54.88,77.13 54.88,75.3 C2.2 | 54.88,77.13 55.38,77.64 IC1.3 55.59,77.84 58.74,80.99 58.74,82.11 60.77,84.14 IC1.21 60.97,84.34 61.89,85.25 62.7,85.25 C1.2 62.8,85.56 66.36,89.12 66.36,89.73 IRM2.GND-B | 53.51,77.99 54.27,78.75 IC1.5 | 53.51,77.99 53.05,77.53 52.74,77.53 C3.2 | 54.88,77.13 54.37,77.13 53.51,77.99 | 37.3,86.07 TP15.TP | 37.3,86.07 33.64,89.73 IRM16.GND-B 33.74,89.32 24.91,80.48 v21.65,80.48 19.62,80.48 IRM15.GND-B | IRM1.GND-B 50,92.47 44.51,86.98 | 44.51,86.98 44.21,86.68 38.01,86.68 37.5,86.17 37.3,86.07 | 44.51,86.98 53.51,77.99 | 10.94,64.48 13.93,61.48 13.93,59.04 CN1.1 13.73,58.94 13.02,58.94 8.24,54.17 8.24,50.91 7.53,50.2 IRM13.GND-B 7.43,50 10.58,46.85 10.58,35.17 10.27,34.86 10.27,33.64 IRM12.GND-B | 10.94,64.48 10.27,65.14 10.27,66.36 IRM14.GND-B | v10.78,64.33 10.94,64.48 | v79,30 78,31 v78,35 77,34 v74,34 | v24,26 25,27 v26,27 | v27,29 27,35 v26,36
  other vias: 50,98 59.39,97.1 68.43,94.39 76.77,89.96 84.08,84 90.09,76.72 94.56,68.41 98.28,50 97.38,40.61 94.67,31.57 90.24,23.23 84.28,15.92 77,9.91 68.69,5.44 59.67,2.67 50.28,1.72 40.88,2.62 31.85,5.33 23.51,9.76 16.2,15.72 10.19,23 2.9,59.11 5.61,68.15 23.28,89.81 31.59,94.28 40.61,97.05 69,17 82,25 73,16 35,18 29,20 22,33 22,46 22,39 17,44 17,36 12,44 17,50 9,44 11,52 23,65 17,65 27,77 32,84 33,75 39,80 42,77 46,81 50,81 39,73 82,47 88,52 85,66 22,57 20,28 55,91 52,91 57,79 52,75 79,56 28,70 73,86 69.4,85.7 54,81 93,59 34,23 38,23 73,83 77,75
  pour Bottom: -7,107 107,107 107,-7 -7,-7
  pour Top: -6,107 107,107 107,-7 -7,-7 -7,107
MISO  (via drill 0.3)
  Top 0.254: v57.01,83.33 55.59,81.9 55.59,77.23 v57.01,75.81 | v81.8,58.53 80.58,59.75 v77.94,59.75 v77.94,57.92 | v73.98,25.01 71.74,22.77 58.84,22.77 57.82,21.75 57.82,21.45 56.4,20.03 56.4,18.91 SV1.5
  Bottom 0.254: v57.01,83.33 57.01,85.87 56.6,86.27 56.6,86.47 IC1.16 | v57.01,75.81 57.92,75.81 60.16,73.57 63.41,73.57 73.47,63.51 75.3,63.51 77.94,60.87 v77.94,59.75 | v81.8,58.53 82.92,57.42 83.63,57.42 P1.5 | v73.98,25.01 73.98,29.68 75.7,31.41 75.7,33.39 73.75,33.39 73.39,33.75 73.39,34.25 73.75,34.61 75.7,34.61 75.7,55.69 v77.94,57.92
MOSI  (via drill 0.3)
  Top 0.254: v56.4,81.8 56.4,81.5 v69,68.9 | v83.02,54.98 83.02,34.96 71.23,23.18 56.71,23.18 55.28,21.75 55.28,21.45 53.86,20.03 53.86,18.91 SV1.7
  Bottom 0.254: v56.4,81.8 56.4,85.36 56.1,85.66 56.1,85.97 IC1.15 | v69,68.9 73.88,68.9 80.28,62.5 85.15,62.5 85.36,62.29 85.36,56.91 84.34,55.89 83.73,55.89 P1.6 83.63,55.79 83.02,55.18 v83.02,54.98
N$1
  Top 0.254: LED12.2-DOUT 3.87,43.29 3.87,52.95 6.92,55.99 LED13.4-DIN
N$2
  Top 0.254: LED7.4-DIN 76.21,15.25 76.21,12.71 77.43,11.49 78.14,11.49 87.39,20.74 87.39,22.06 LED6.2-DOUT
N$3
  Bottom 0.254: C1.1 61.48,86.47 61.48,85.97 60.47,84.95 IC1.20
N$4
  Bottom 0.254: R4.2 65.75,75.4 67.88,77.53 67.88,77.94 68.8,78.85 Q1.1
NEOPIXEL
  Top 0.254: LED1.4-DIN 56.1,92.98 56.1,86.07 62.19,79.97 67.47,79.97 82.51,64.94 82.51,55.38 80.68,53.56 80.68,33.24 71.03,23.58 61.38,23.58 59.86,25.11 54.98,25.11 51.32,21.45 SV1.10
NEOPIXEL1
  Top 0.254: LED2.4-DIN 71.95,87.49 71.74,87.49 64.02,95.21 61.48,95.21 LED1.2-DOUT
NEOPIXEL2
  Top 0.254: LED2.2-DOUT 77.94,87.39 77.94,85.66 84.65,78.96 84.65,76.21 LED3.4-DIN
NEOPIXEL3
  Top 0.254: LED3.2-DOUT 90.13,73.88 90.13,69.71 92.27,67.58 92.27,61.18 92.06,60.97 LED4.4-DIN
NEOPIXEL4
  Top 0.254: LED5.4-DIN 93.08,44.01 93.08,45.73 96.13,48.78 96.13,56.71 LED4.2-DOUT
NEOPIXEL5
  Top 0.254: LED6.4-DIN 87.49,28.05 87.49,28.26 95.21,35.98 95.21,38.52 LED5.2-DOUT
NEOPIXEL6
  Top 0.254: LED8.4-DIN 60.97,8.04 72.05,8.04 73.88,9.87 LED7.2-DOUT
NEOPIXEL7
  Top 0.254: LED9.4-DIN 44.01,6.92 45.33,6.92 48.37,3.87 56.71,3.87 LED8.2-DOUT
NEOPIXEL8
  Top 0.254: LED10.4-DIN 28.05,12.51 28.26,12.51 35.98,4.79 38.52,4.79 LED9.2-DOUT
NEOPIXEL9  (via drill 0.3)
  Top 0.254: v18.5,18.91 18.5,18.2 22.06,14.64 22.06,12.61 LED10.2-DOUT | v16.27,22.87 15.35,23.79 LED11.4-DIN
  Bottom 0.254: v18.5,18.91 18.5,19.11 16.27,21.35 v16.27,22.87
NEOPIXEL10
  Top 0.254: LED11.2-DOUT 9.87,26.12 9.87,30.29 8.04,32.12 8.04,39.03 LED12.4-DIN
NEOPIXEL11
  Top 0.254: LED13.2-DOUT 4.79,61.48 4.79,64.63 12.1,71.95 12.51,71.95 LED14.4-DIN
NEOPIXEL12
  Top 0.254: LED14.2-DOUT 12.61,77.94 14.64,77.94 21.35,84.65 23.79,84.65 LED15.4-DIN
NEOPIXEL13
  Top 0.254: LED15.2-DOUT 26.12,90.13 27.85,90.13 30.29,92.57 38.52,92.57 39.03,92.06 LED16.4-DIN
NRST
  Bottom 0.254: TP6.TP 51.93,13.83 51.93,18.1 52.74,18.91 52.74,20.33 53.76,21.35 SV1.8
RX-CAM
  Bottom 0.254: SJ1.3 85.76,50 85.76,62.5 84.95,63.31 83.73,63.31 P1.1
RX-PC
  Bottom 0.254: TP8.TP 48.07,13.83 48.07,15.56 44.72,18.91 44.72,20.33 43.7,21.35 SV1.16
SCK  (via drill 0.3)
  Top 0.254: v69.61,75.09 69.61,66.76 76.01,60.36 | 76.01,60.36 81.19,60.36 v81.9,59.65 | SV1.9 51.22,18.91 51.22,20.03 50.2,21.04 50.2,21.75 53.96,25.51 69.71,25.51 70.42,24.8 71.03,24.8 75.7,29.48 75.7,59.96 76.01,60.26 76.01,60.36
  Bottom 0.254: v69.61,75.09 70.62,76.11 70.62,79.77 70.52,79.87 70.52,87.19 70.83,87.49 70.83,89.42 67.68,92.57 63.11,92.57 58.74,88.2 58.74,86.58 IC1.17 | v81.9,59.65 82.92,59.65 83.63,58.94 P1.4
SCL
  Bottom 0.254: TP11.TP 49.29,13.83 49.29,16.88 47.26,18.91 47.26,20.33 46.24,21.35 SV1.14 46.14,21.45 45.12,22.47 42.38,22.47 39.84,25.01 31,25.01 R3.2
SDA
  Bottom 0.254: TP10.TP 50.61,13.83 50.61,18.1 49.8,18.91 49.8,20.33 48.78,21.35 SV1.12 48.68,21.45 47.26,22.87 42.58,22.87 38.32,27.14 R1.2
SS1  (via drill 0.3)
  Top 0.254: v54.47,86.17 47.36,86.17 v25.41,64.22 | v36.08,28.87 36.08,28.56 42.58,22.06 42.58,21.04 43.7,19.93 44.01,19.93 45.12,18.81 45.12,18.5 45.83,17.79 47.66,17.79 48.68,18.81 SV1.11
  Bottom 0.254: v54.47,86.17 55.18,85.46 55.38,85.46 IC1.14 | v25.41,64.22 25.41,52.54 25.21,52.34 25.21,39.74 v36.08,28.87
SS-CAM
  Bottom 0.254: SJ1.1 82.72,50 82.72,54.37 81.19,55.89 81.19,59.86 81.6,60.26 83.63,60.26 P1.3
SWCLK
  Bottom 0.254: TP4.TP 54.47,13.83 54.47,15.56 57.82,18.91 57.82,20.33 58.84,21.35 SV1.4
SWDIO
  Bottom 0.254: TP5.TP 53.25,13.83 53.25,16.88 55.28,18.91 55.28,20.33 56.3,21.35 SV1.6
SWO
  Bottom 0.254: TP18.TP 41.67,13.83 41.67,18.3 41.16,18.81 SV1.17
TX-CAM
  Bottom 0.254: P1.2 83.63,61.79 80.89,61.79 75.2,56.1 75.2,35.01 73.58,35.01 72.99,34.42 72.99,33.58 73.58,32.99 75.2,32.99 75.2,31.51 62.5,18.81 62.5,16.57 58.53,12.61 41.16,12.61 38.62,15.15 38.62,18.81 SV1.19
TX-PC
  Bottom 0.254: TP9.TP 46.75,13.83 46.75,14.34 42.18,18.91 42.18,20.33 41.16,21.35 SV1.18
UI  (via drill 0.3)
  Top 0.254: v44.82,14.64 43.9,14.64 39.64,18.91 39.64,20.33 38.62,21.35 SV1.20
  Bottom 0.254: TP7.TP 44.82,14.54 v44.82,14.64

## Text on the board
bPlace: JLCJLCJLCJLC
bNames: GND | D+ | D- | +5V